# Altium PCB Payload.PcbDoc
Units mm, origin at the board's own origin, x right, y up, seen from the top; angles counter-clockwise.
Board outline 47.6 x 56 mm, 2 copper layers (Top Layer, Bottom Layer); 18 components, 38 nets, 63 pads, 113 vias.
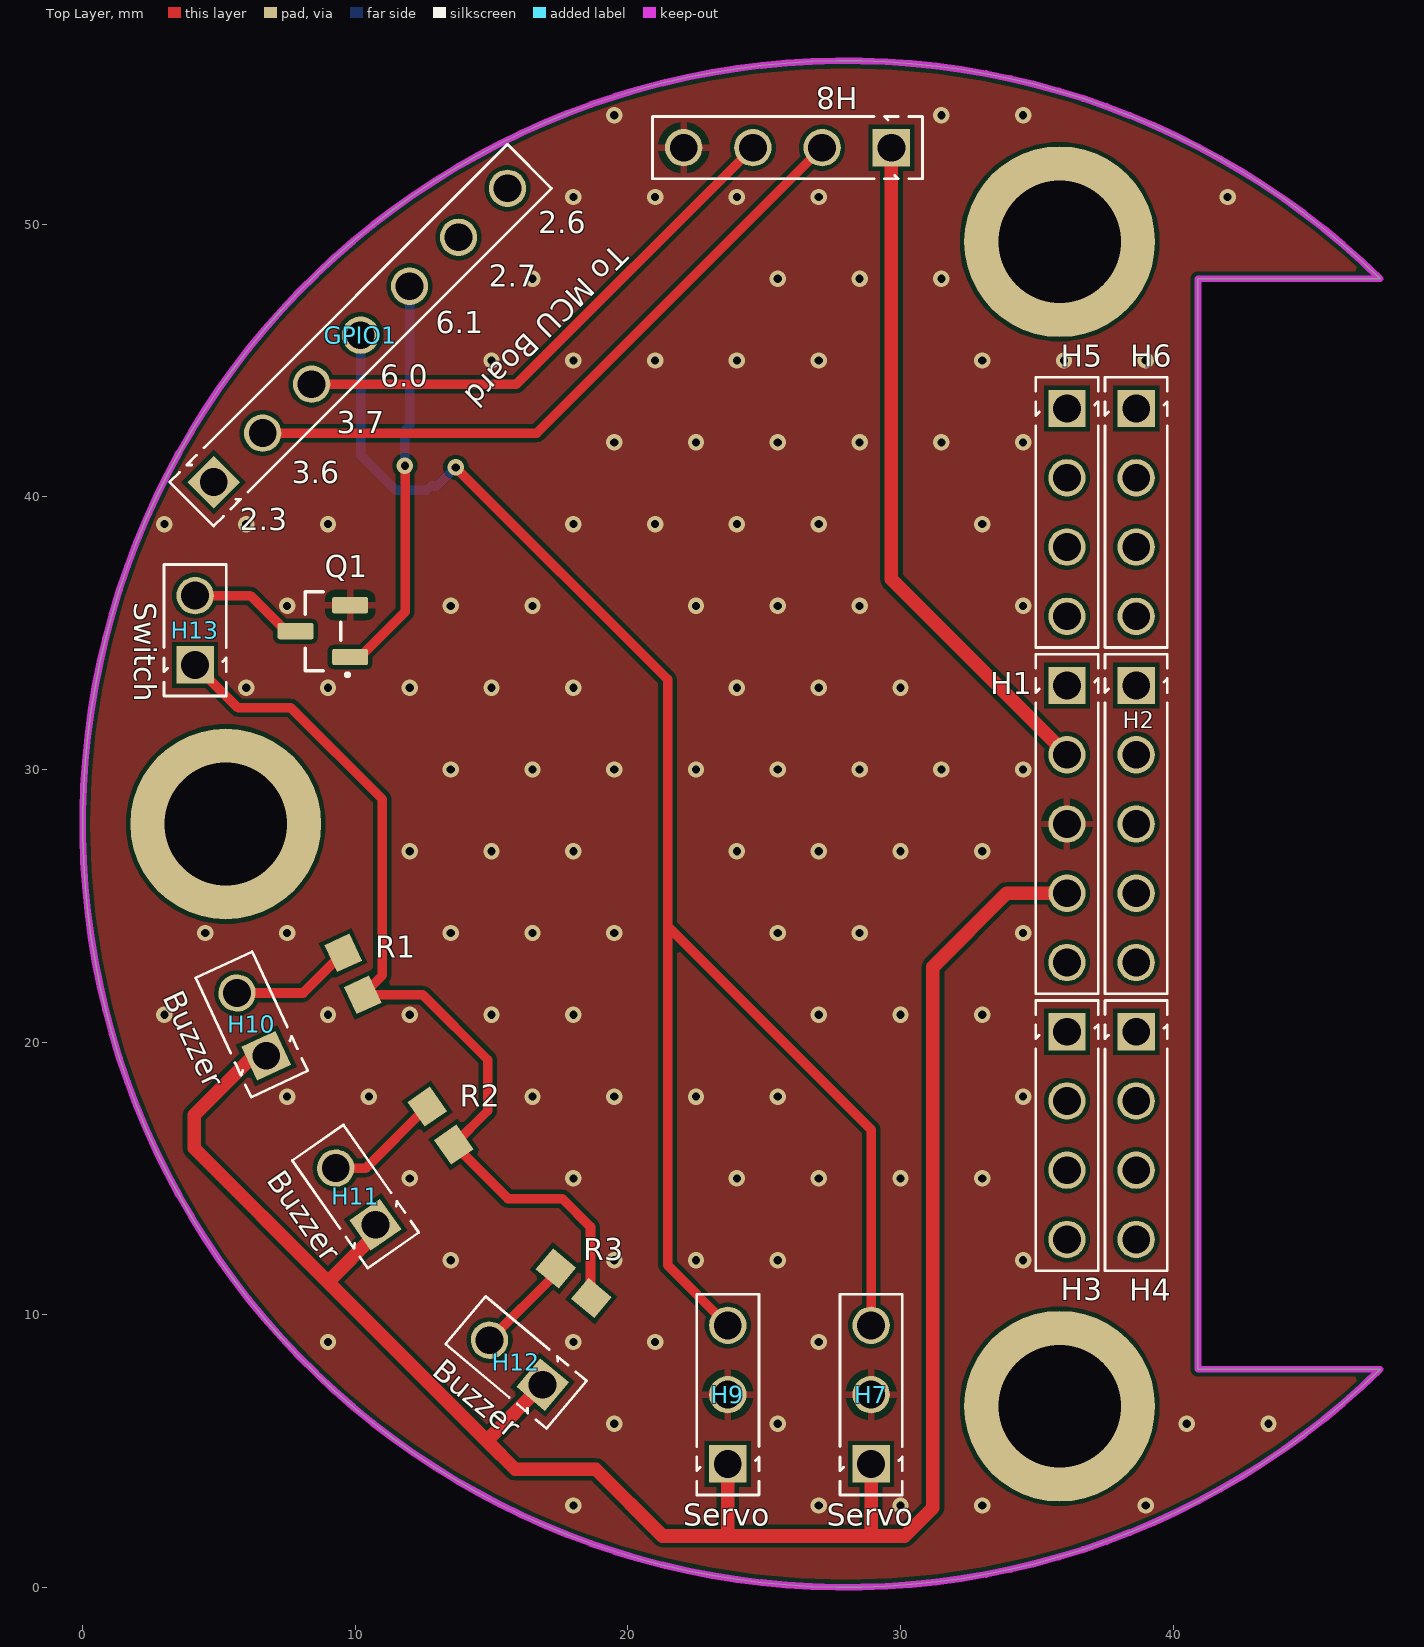
[diagram p0: Top Layer view]
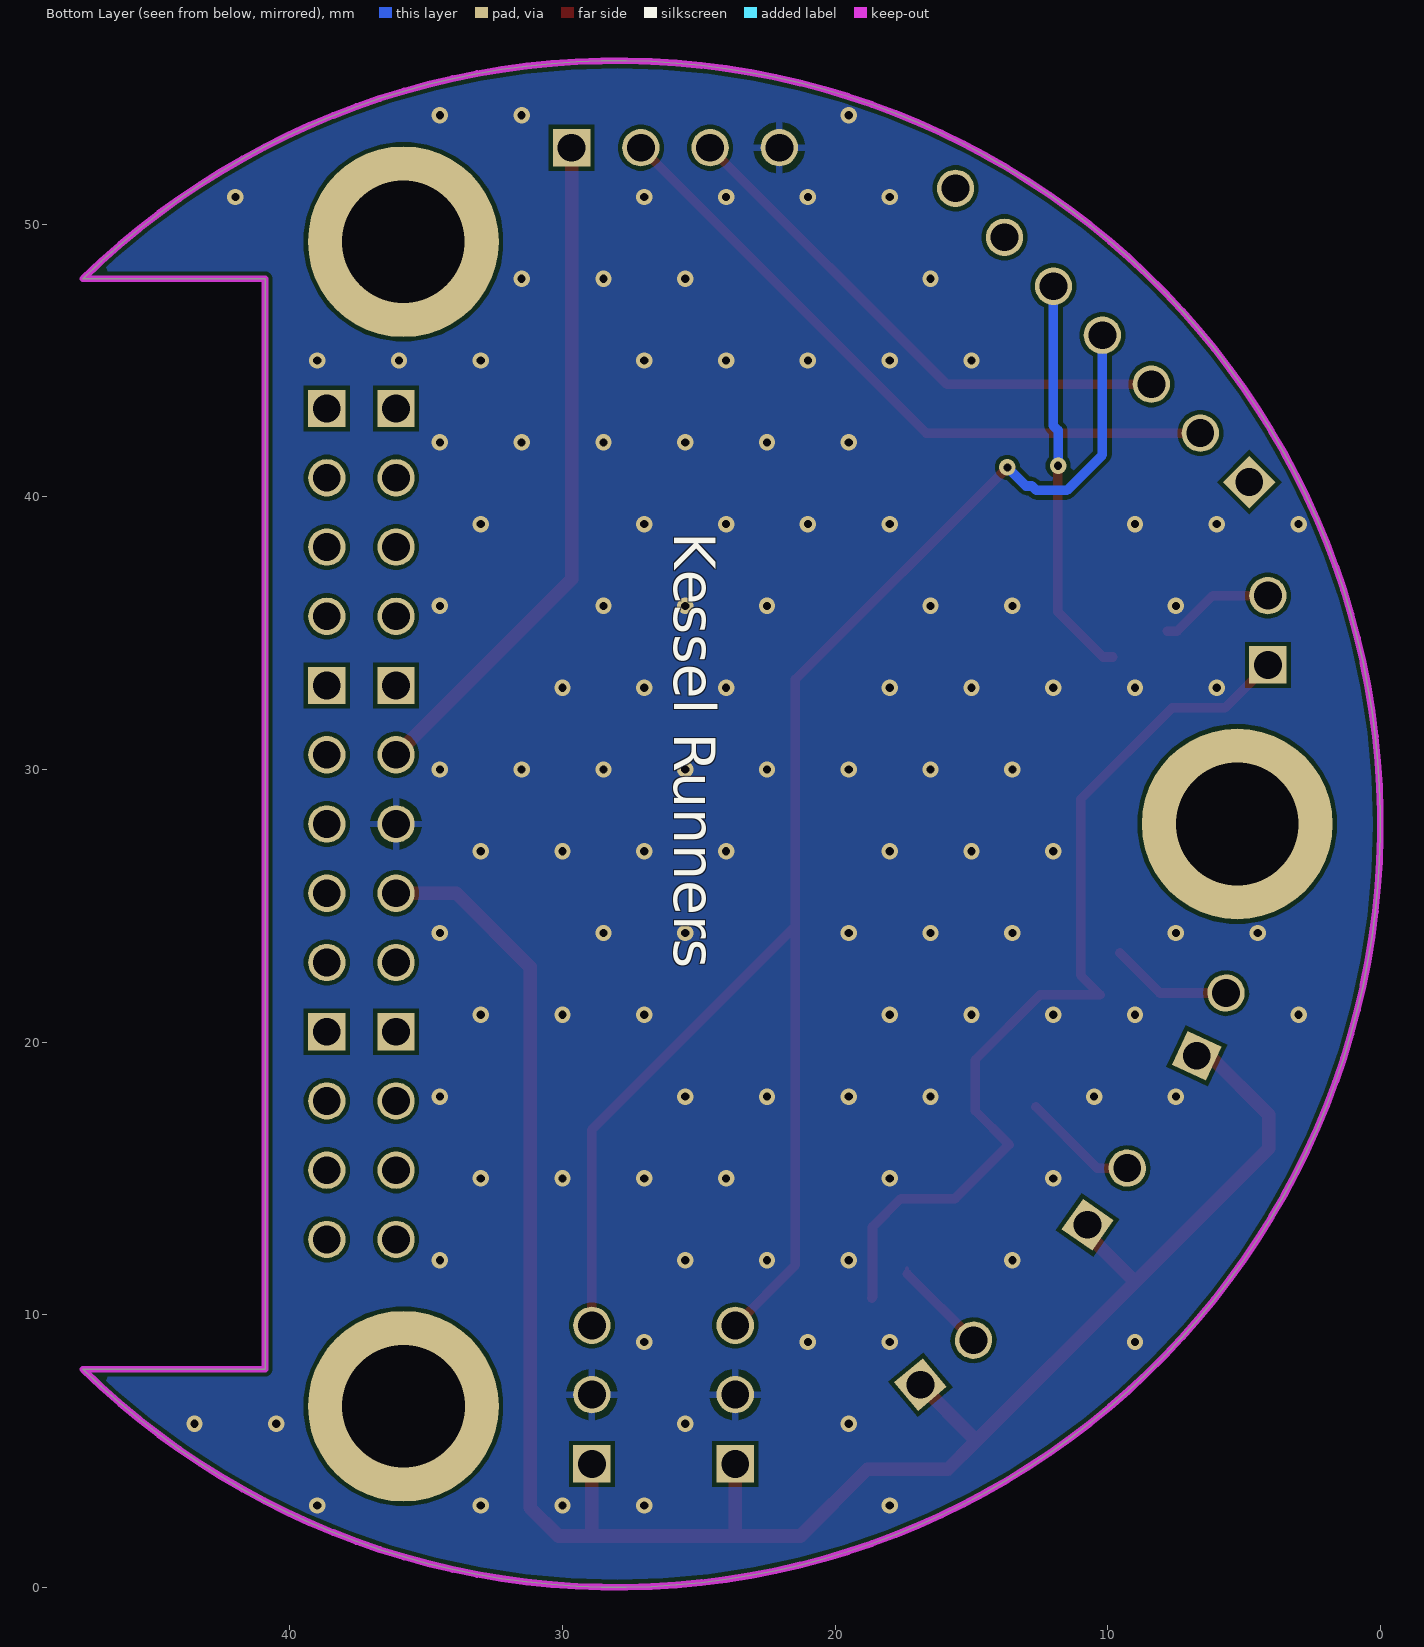
[diagram p1: Bottom Layer view, seen from below]

## Layer stack, top to bottom
Top Solder: solder mask 0.0102, Solder Resist, Dk 3.5
Top Layer: signal copper 0.0356
Dielectric 1: dielectric 0.32, FR-4, Dk 4.8
Bottom Layer: signal copper 0.0356
Bottom Solder: solder mask 0.0102, Solder Resist, Dk 3.5

## Board outline
47.596,8 cw(c28,28) 47.596,48 47.6,48 40.913,48 40.913,8

## Design rules (kind name [scope] priority, off if disabled: settings)
Clearance [All] p1: gap=0.152 ignorepadtopadclearanceinfootprint=FALSE
ComponentClearance [All] p1: gap=0.1 collisioncheckmode=3 verticalgap=0.254 showdistances=FALSE
HoleSize [All] p1: absolutevalues=TRUE maxlimit=6.2 minlimit=0.3 maxpercent=80.000 minpercent=20.000
MinimumAnnularRing [All] p1: minimumring=0.15
MinimumSolderMaskSliver [All] p1: minsoldermaskwidth=0.1
PolygonConnect ViaConnect [IsVia] p1: connectstyle=Direct reliefconductorwidth=0.254 reliefentries=4 polygonreliefangle="90 Angle" airgapwidth=0.254
PolygonConnect [All] p2: connectstyle=Relief reliefconductorwidth=0.254 reliefentries=4 polygonreliefangle="90 Angle" airgapwidth=0.254
RoutingVias [All] p1: holewidth=0.3 width=0.6 viastyle="Through Hole" minholewidth=0.3 minwidth=0.5 maxholewidth=1 maxwidth=5
SilkToSilkClearance [All] p1: silktosilkclearance=0.1
SilkToSolderMaskClearance [IsPad] p1: minsilkscreentomaskgap=0.1 clearancetoexposedcopper=TRUE
SolderMaskExpansion [All] p1: expansion=0.051 istentingtop=FALSE
SupplyNets "Schematic Supply Nets_2" [InNet('3V3')] p1: voltage=0.000
SupplyNets "Schematic Supply Nets_1" [InNet('GND')] p2: voltage=0.000
SupplyNets "Schematic Supply Nets" [InNet('5V')] p3: voltage=0.000
Width [All] p1: maxlimit=25.4 minlimit=0.15 preferedwidth=0.3
25 further rules are at their usual default settings.

## Components (designator, comment, footprint, x,y, rotation, side; value= is the part's Value field where it differs from the comment)
GPIO1 "HDR,2.54mm,1x7" HEADER_2.54MM_1x7PIN 10.196,45.93 r45 top locked
H1 "Header - 2.54mm,1x5-pin" HEADER_2.54MM_1X5PIN 36.107,28 r270 top locked
H2 "Header - 2.54mm,1x5-pin" HEADER_2.54MM_1X5PIN 38.647,28 r270 top locked
H3 "Header - 2.54mm,1x4-pin" HEADER_2.54MM_1X4PIN 36.107,16.57 r270 top locked
H4 "Header - 2.54mm,1x4-pin" HEADER_2.54MM_1X4PIN 38.647,16.57 r270 top locked
H5 "Header - 2.54mm,1x4-pin" HEADER_2.54MM_1X4PIN 36.107,39.43 r270 top locked
H6 "Header - 2.54mm,1x4-pin" HEADER_2.54MM_1X4PIN 38.647,39.43 r270 top locked
H7 "3 Pin Header" "3 Pin Header" 28.924,7.068 r90 top
H8 "Header - 2.54mm,1x4-pin" HEADER_2.54MM_1x4PIN 25.857,52.808 r180 top
H9 "3 Pin Header" "3 Pin Header" 23.665,7.068 r90 top
H10 "2 Pin Header" "2 Pin Header" 6.199,20.649 r115 top
H11 "2 Pin Header" "2 Pin Header" 10.013,14.338 r125 top
H12 "2 Pin Header" "2 Pin Header" 15.898,8.249 r140 top
H13 "2 Pin Header" "2 Pin Header" 4.126,35.108 r90 top
Q1 "AS2312" SOT23-3N-1.15mm 8.813,35.076 r180 top
R1 "F0603G0R20FNTR" CAPC1608X90 9.916,22.501 r115 top
R2 "F0603G0R20FNTR" CAPC1608X90 13.13,16.936 r125 top
R3 "F0603G0R20FNTR" CAPC1608X90 18.011,11.154 r140 top

## Footprints (in the part's own frame and the unit in brackets; to place one, negate y for a bottom-side part, rotate by r counter-clockwise, add the part's x,y. Pads: shape width x height; smd on the part's side, far side on the other; paste and mask are expansions set on the pad)
"2 Pin Header" [mm]
  rect 1.37x1.37 hole 1.02: 1(-1.27,0)
  round 1.37 hole 1.02: 2(1.27,0)
  silkscreen extent -2.41,-1.14 2.41,1.14
"3 Pin Header" [mm]
  rect 1.37x1.37 hole 1.02: 1(-2.54,0)
  round 1.37 hole 1.02: 2(0,0) 3(2.54,0)
  silkscreen extent -3.68,-1.14 3.68,1.14
CAPC1608X90 [mm]
  rect 1.1x1 smd: 1(-0.85,0) 2(0.85,0)
  body extent -0.8,-0.41 0.8,0.41, height 0.71
HEADER_2.54MM_1X4PIN [mm]
  rect 1.37x1.37 hole 1.02: 1(-3.81,0)
  round 1.37 hole 1.02: 2(-1.27,0) 3(1.27,0) 4(3.81,0)
  silkscreen extent -4.95,-1.14 4.95,1.14
HEADER_2.54MM_1x4PIN [mm]
  rect 1.37x1.37 hole 1.02: 1(-3.81,0)
  round 1.37 hole 1.02: 2(-1.27,0) 3(1.27,0) 4(3.81,0)
  silkscreen extent -4.95,-1.14 4.95,1.14
HEADER_2.54MM_1X5PIN [mm]
  rect 1.37x1.37 hole 1.02: 1(-5.08,0)
  round 1.37 hole 1.02: 2(-2.54,0) 3(0,0) 4(2.54,0) 5(5.08,0)
  silkscreen extent -6.22,-1.14 6.22,1.14
HEADER_2.54MM_1x7PIN [mm]
  rect 1.37x1.37 hole 1.02: 1(-7.62,0)
  round 1.37 hole 1.02: 2(-5.08,0) 3(-2.54,0) 4(0,0) 5(2.54,0) 6(5.08,0) 7(7.62,0)
  silkscreen extent -8.76,-1.14 8.76,1.14, body extent -8.81,-1.19 8.81,1.19
SOT23-3N-1.15mm [mm] "SOT23, 3-pin, 1.15mm high, nominal pads"
  rrect25% 1.32x0.6 smd mask+0.051: 1(-1,0.95) 2(-1,-0.95) 3(1,0)
  silkscreen extent -0.93,-1.45 0.65,1.63, body extent -1.19,-1.45 1.21,1.45, height 0.91

## Part data
GPIO1: "Connector - 2.54mm, 1x7-pin"
Q1: "Transistor - MOSFET, N-Channel AS2312", Package=SOT-23-3, Power=1.2W, Rated Voltage="20 Vds", Supplier 1 Part No.=4530-AS2312CT-ND, Temp Range="0°C ~ 150°C (TJ)", APSS Standard Part="APSS Standard", MF Part No.=AS2312, Supplier 1=Digikey
R1 R2 R3: "200 mA AC 32 V DC Fuse Board Mount (Cartridge Style Excluded) Surface Mount 0603 (1608 Metric)", Package="0603-2 AVX", Availability="In Stock", Check_prices=https://www.snapeda.com/parts/F0603G0R20FNTR/AVX+%252F+Kyocera/view-part/?ref=eda, MF=AVX, MP=F0603G0R20FNTR, Price=None, Purchase-URL=https://pricing.snapeda.com/search/part/F0603G0R20FNTR/?ref=eda, SnapEDA_Link=https://www.snapeda.com/parts/F0603G0R20FNTR/AVX+%252F+Kyocera/view-part/?ref=snap

## Free pads (board coordinates)
  round 7 hole 4.5: 1(5.25,28) 1(35.837,6.643) 1(35.837,49.357)

## Via types
v1: diameter 0.6, hole 0.3, Top Layer to Bottom Layer, tented top, 111 vias
v2: diameter 0.6, hole 0.3, Top Layer to Bottom Layer, 2 vias

## Nets (pads, with @x,y where several pads share a name; then routed paths per layer and width w, separated by ;. In a path a pad name is that pad's centre, name@x,y a point inside that pad or via, vN(x,y) a via of type N, cw(c..) or ccw(c..) an arc to the next point about the centre after c; other vN are vias at no path point)
1V8: H1.1
1V8_PG: H2.1
3V3: H1.2 H8.1 | length 24.9
  Top Layer w0.5: H8.1 29.667,36.98 H1.2
3V3_PG: H2.2
5V: H1.4 H7.1 H9.1 H10.1 H11.1 H12.1 | length 75.2
  Top Layer w0.15: H11.1@10.741,12.948 H11.1 ; 14.902,5.296 14.902,5.464 ; 23.665,1.924 23.709,1.88 ; 28.859,1.88 28.924,1.944
  Top Layer w0.5: H10.1 6.263,19.498 4.091,17.326 4.091,16.107 8.995,11.202 ; H11.1@10.741,12.948 8.995,11.202 ; 14.902,5.464 H12.1 ; 23.665,1.924 H9.1 ; 28.924,1.944 H7.1 ; H1.4 33.892,25.46 31.189,22.757 31.189,2.916 30.153,1.88 28.859,1.88 23.709,1.88 21.268,1.88 18.82,4.329 15.869,4.329 14.902,5.296 8.995,11.202
Buzzer_CTRL: H3.4
EN_1V8: H2.3
EN_3V3: H2.4
EN_5V: H2.5
GND: H1.3 H7.2 H8.4 H9.2 Q1.2
  other v1: 18,3 27,3 30,3 33,3 39,3 19.5,6 25.5,6 40.5,6 43.5,6 9,9 18,9 21,9 27,9 13.5,12 19.5,12 22.5,12 25.5,12 34.5,12 12,15 18,15 24,15 27,15 30,15 33,15 7.5,18 10.5,18 16.5,18 19.5,18 22.5,18 25.5,18 34.5,18 3,21 9,21 12,21 15,21 18,21 27,21 30,21 33,21 4.5,24 7.5,24 13.5,24 16.5,24 19.5,24 25.5,24 28.5,24 34.5,24 12,27 15,27 18,27 24,27 27,27 30,27 33,27 13.5,30 16.5,30 19.5,30 22.5,30 25.5,30 28.5,30 31.5,30 34.5,30 6,33 9,33 12,33 15,33 18,33 24,33 27,33 30,33 7.5,36 13.5,36 16.5,36 22.5,36 25.5,36 28.5,36 34.5,36 3,39 6,39 9,39 18,39 21,39 24,39 27,39 33,39 19.5,42 22.5,42 25.5,42 28.5,42 31.5,42 34.5,42 15,45 18,45 21,45 24,45 27,45 33,45 36,45 39,45 16.5,48 25.5,48 28.5,48 31.5,48 18,51 21,51 24,51 27,51 42,51 19.5,54 31.5,54 34.5,54
GPIO2.3: GPIO1.1
GPIO2.6: GPIO1.7
GPIO2.7: GPIO1.6
GPIO3.6: GPIO1.2 H8.2 | length 24.9
  Top Layer w0.35: GPIO1.2 16.656,42.338 H8.2
GPIO3.7: GPIO1.3 H8.3 | length 19.8
  Top Layer w0.35: GPIO1.3 15.913,44.134 H8.3
GPIO6.0: GPIO1.4 H7.3 H9.3 | length 62.1
  Top Layer w0.35: v2(13.684,41.082) 21.456,33.31 21.456,24.256 ; H9.3 21.456,11.818 21.456,24.256 ; H7.3 28.924,16.788 21.456,24.256
  Bottom Layer w0.35: GPIO1.4 10.196,41.539 11.499,40.236 12.619,40.236 12.781,40.398 12.999,40.398 v2(13.684,41.082)
GPIO6.1: GPIO1.5 Q1.1 | length 14.7
  Top Layer w0.35: Q1.1 10.173,34.126 11.828,35.781 11.828,41.132 v2(11.821,41.139)
  Bottom Layer w0.35: v2(11.821,41.139) 11.821,42.436 11.992,42.606 GPIO1.5
GPS_EN: H3.3
GPS_RX: H3.2
GPS_TX: H3.1
I2C_SCL: H6.4
I2C_SDA: H6.3
LoRa_CS: H5.1
LORA_RX_IRQ: H4.1
MSP_P1.0: H6.1
MSP_P1.1: H6.2
MSP_P5.2: H4.2
MSP_P5.3: H4.3
MSP_P5.4: H4.4
NetH10_2: H10.2 R1.2 | length 4.5
  Top Layer w0.35: H10.2 8.086,21.8 R1.2
NetH11_2: H11.2 R2.2 | length 4.3
  Top Layer w0.35: H11.2 10.389,15.379 R2.2
NetH12_2: H12.2 R3.2 | length 3.6
  Top Layer w0.15: R3.2@17.36,11.5 R3.2
  Top Layer w0.35: H12.2 R3.2@17.36,11.5
NetH13_1: H13.1 R1.1 R2.1 R3.1 | length 34.5
  Top Layer w0.35: H13.1 5.702,32.261 7.641,32.261 10.991,28.911 10.991,22.447 R1.1 12.484,21.73 14.86,19.354 14.86,17.482 R2.1 15.599,14.258 17.595,14.258 18.63,13.223 18.63,10.639 R3.1
NetH13_2: H13.2 Q1.3 | length 4.2
  Top Layer w0.35: H13.2 6.151,36.378 7.453,35.076 Q1.3
SPI_MISO: H5.4
SPI_MOSI: H5.3
SPI_SCK: H5.2
Vbat: H1.5

## Polygon pours and split planes (outlines as drawn)
GND on Top Layer "GND_L01_P000" (solid, pour order 0): 47.596,8 cw(c28,28) 47.596,48 47.6,48 40.913,48 40.913,8
GND on Bottom Layer "GND_L02_P001" (solid, pour order 1): 47.596,8 cw(c28,28) 47.596,48 47.6,48 40.913,48 40.913,8

## Keep-outs
Keep-Out Layer:
  lines w0.25: 40.913,8 40.913,48 ; 40.913,8 47.596,8 ; 40.913,8 47.596,8 ; 40.913,8 40.913,48 ; 40.913,48 47.6,48 ; 40.913,48 47.6,48 ; 47.596,8 cw(c28,28) 47.596,48 ; 47.596,8 cw(c28,28) 47.596,48 ; 47.596,48 47.6,48 ; 47.596,48 47.6,48

## Silkscreen, mask and mechanical layers (free items; w line width, h text height)
Top Overlay:
  text "2.6" at 16.707,49.678 h0.8
  text "To MCU Board" at 19.497,49.318 h0.8 r225
  text "2.7" at 14.897,47.706 h0.8
  text "6.1" at 12.954,45.999 h0.8
  text "6.0" at 10.923,44.042 h0.8
  text "3.7" at 9.319,42.334 h0.8
  text "3.6" at 7.671,40.495 h0.8
  text "2.3" at 5.757,38.773 h0.8
  text "Switch" at 1.899,36.139 h0.8 r270
  text "Buzzer" at 2.913,21.648 h0.8 r295
  text "Buzzer" at 6.714,14.925 h0.8 r305
  text "Buzzer" at 12.772,7.825 h0.8 r320
  text "Servo" at 22.028,2.251 h0.8
  text "Servo" at 27.301,2.251 h0.8
Bottom Overlay:
  text "Kessel Runners" at 25.904,38.702 h1.52 r90
Mechanical 1:
  text "This is an example payload" at 18.316,60.326 h1.52
  text "Feel free to use this as template" at 16.909,58.456 h1.52
  text "Battery cutout" at 46.172,24.284 h1.52 r90
Board Outline:
  lines w0.15: 47.598,47.925 ccw(c47.6,48) 47.6,47.925 ; 47.596,8.075 cw(c47.596,8) 47.671,8 ; 47.596,8.075 cw(c47.596,8) 47.671,8 ; 47.596,8.075 40.988,8.075 40.988,47.925 47.6,47.925 ; 47.6,47.925 ccw(c47.6,48) 47.675,48 ; 47.6,47.925 ccw(c47.6,48) 47.675,48 ; 47.636,48.066 cw(c47.6,48) 47.675,48 ; 47.636,48.066 cw(c47.6,48) 47.675,48 ; 47.636,48.066 ccw(c28,28) 47.648,7.946 ccw(c47.596,8) 47.671,8
Mechanical 15:
  lines w0.254: 41.46,9.025 41.46,47.025 49.46,47.025 49.46,9.025 41.46,9.025